# EAGLE board mini_17_cpxsq_modified (EAGLE 6.0)
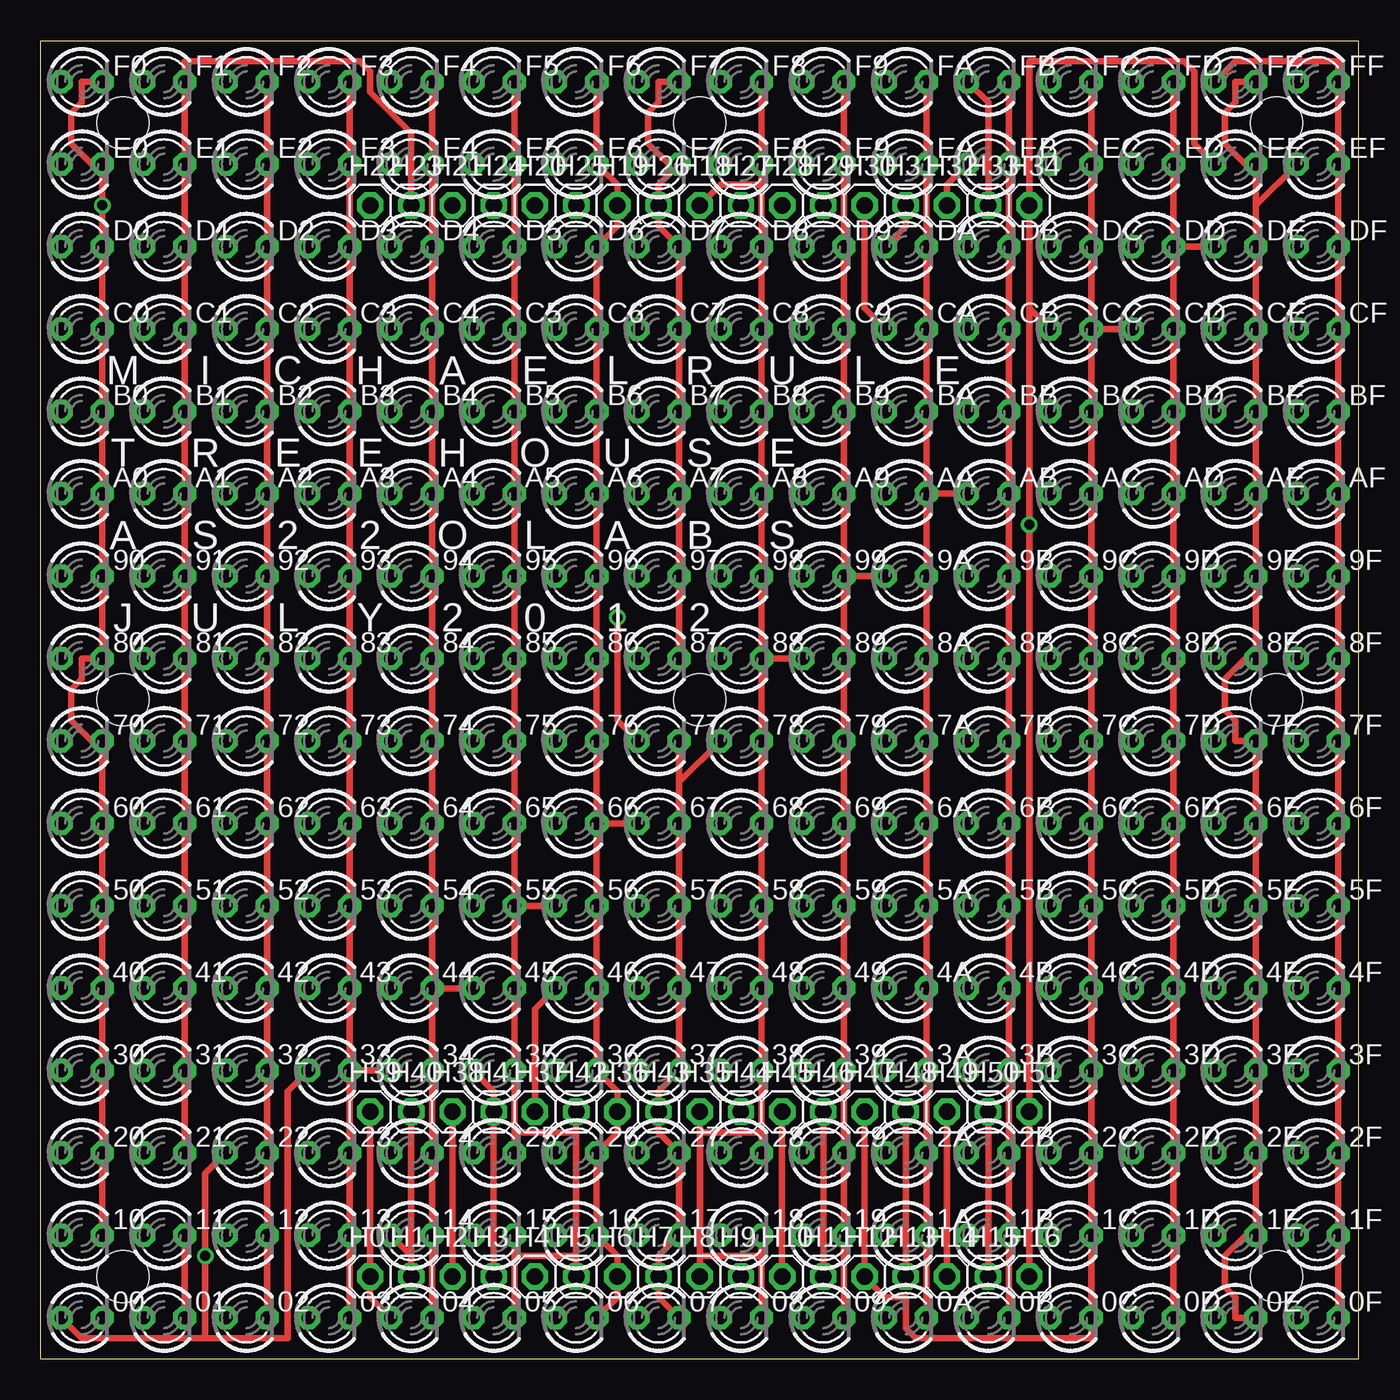
[diagram p0: board, top side]
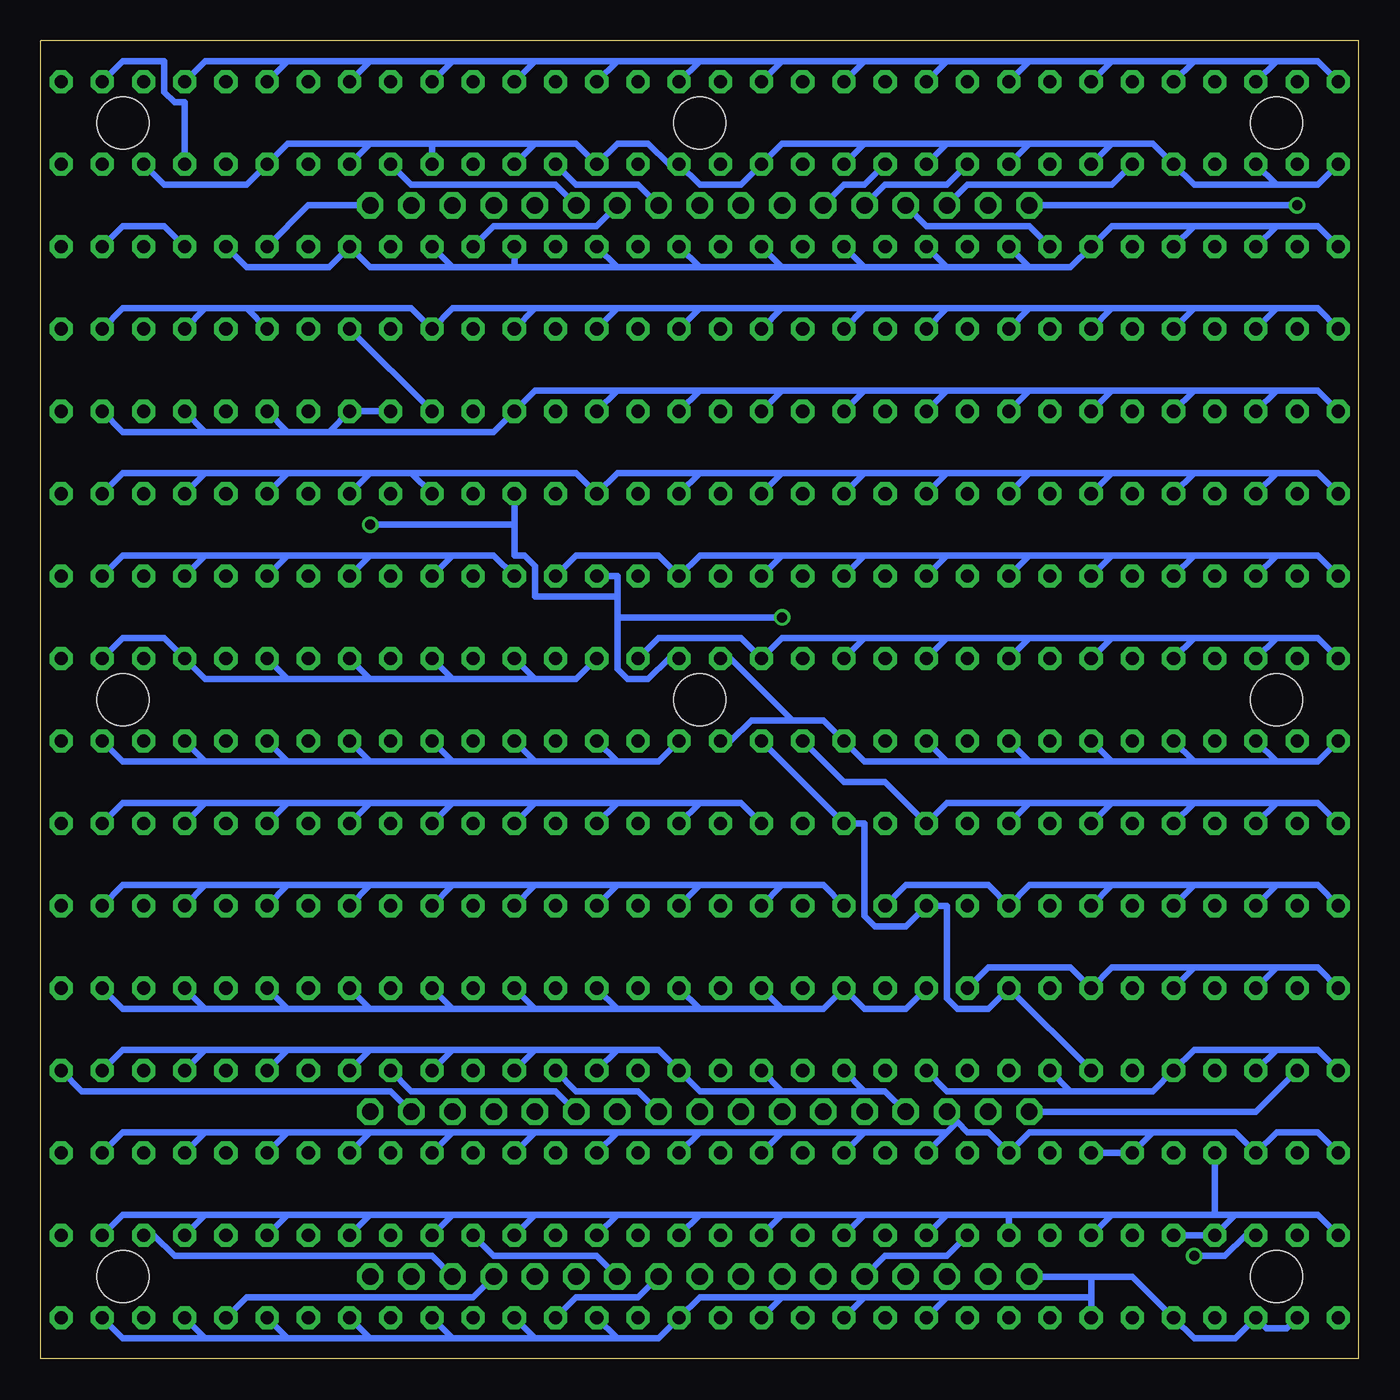
[diagram p1: board, bottom side, seen from below]

Size 81.28 x 81.28 mm. Coordinates in mm from the lower left corner, seen from the top.
Outline: 0,0 0,81.28 81.28,81.28 81.28,0 0,0
Copper layers (1*16): Top 0.035mm / dielectric 1.5mm / Bottom 0.035mm
Design rules: minimum track width 16mil, minimum drill 24mil, track to track 15mil, track to pad 8mil, pad to pad 12mil, via to via 11mil, smd to smd 8mil, copper to edge 40mil, drill to drill 8mil, minimum pad ring 12mil, minimum via ring 8mil, stop-mask expansion 4mil, vias tented up to drill 0mil, thermal gap 10mil
Holes 3.2 mm at 5.08,5.08 5.08,76.2 76.2,5.08 76.2,76.2 5.08,40.64 76.2,40.64 40.64,76.2 40.64,40.64

## Footprints (pad centres in the part's own frame; a part is rotated, then mirrored left to right if it is on the bottom)
LED3MM = drill 0.813 octagon: A -1.27,0; K 1.27,0
1X01 = drill 1.016 octagon: 1 0,0

## Placement (x,y rotation side)
00  [LED3MM]  2.54,2.54 0 top
0A  [LED3MM]  53.34,2.54 0 top
0B  [LED3MM]  58.42,2.54 0 top
0C  [LED3MM]  63.5,2.54 0 top
0D  [LED3MM]  68.58,2.54 0 top
0E  [LED3MM]  73.66,2.54 0 top
0F  [LED3MM]  78.74,2.54 0 top
01  [LED3MM]  7.62,2.54 0 top
1A  [LED3MM]  53.34,7.62 0 top
1B  [LED3MM]  58.42,7.62 0 top
1C  [LED3MM]  63.5,7.62 0 top
1D  [LED3MM]  68.58,7.62 0 top
1E  [LED3MM]  73.66,7.62 0 top
1F  [LED3MM]  78.74,7.62 0 top
02  [LED3MM]  12.7,2.54 0 top
2A  [LED3MM]  53.34,12.7 0 top
2B  [LED3MM]  58.42,12.7 0 top
2C  [LED3MM]  63.5,12.7 0 top
2D  [LED3MM]  68.58,12.7 0 top
2E  [LED3MM]  73.66,12.7 0 top
2F  [LED3MM]  78.74,12.7 0 top
03  [LED3MM]  17.78,2.54 0 top
3A  [LED3MM]  53.34,17.78 0 top
3B  [LED3MM]  58.42,17.78 0 top
3C  [LED3MM]  63.5,17.78 0 top
3D  [LED3MM]  68.58,17.78 0 top
3E  [LED3MM]  73.66,17.78 0 top
3F  [LED3MM]  78.74,17.78 0 top
04  [LED3MM]  22.86,2.54 0 top
4A  [LED3MM]  53.34,22.86 0 top
4B  [LED3MM]  58.42,22.86 0 top
4C  [LED3MM]  63.5,22.86 0 top
4D  [LED3MM]  68.58,22.86 0 top
4E  [LED3MM]  73.66,22.86 0 top
4F  [LED3MM]  78.74,22.86 0 top
05  [LED3MM]  27.94,2.54 0 top
5A  [LED3MM]  53.34,27.94 0 top
5B  [LED3MM]  58.42,27.94 0 top
5C  [LED3MM]  63.5,27.94 0 top
5D  [LED3MM]  68.58,27.94 0 top
5E  [LED3MM]  73.66,27.94 0 top
5F  [LED3MM]  78.74,27.94 0 top
06  [LED3MM]  33.02,2.54 0 top
6A  [LED3MM]  53.34,33.02 0 top
6B  [LED3MM]  58.42,33.02 0 top
6C  [LED3MM]  63.5,33.02 0 top
6D  [LED3MM]  68.58,33.02 0 top
6E  [LED3MM]  73.66,33.02 0 top
6F  [LED3MM]  78.74,33.02 0 top
07  [LED3MM]  38.1,2.54 0 top
7A  [LED3MM]  53.34,38.1 0 top
7B  [LED3MM]  58.42,38.1 0 top
7C  [LED3MM]  63.5,38.1 0 top
7D  [LED3MM]  68.58,38.1 0 top
7E  [LED3MM]  73.66,38.1 0 top
7F  [LED3MM]  78.74,38.1 0 top
08  [LED3MM]  43.18,2.54 0 top
8A  [LED3MM]  53.34,43.18 0 top
8B  [LED3MM]  58.42,43.18 0 top
8C  [LED3MM]  63.5,43.18 0 top
8D  [LED3MM]  68.58,43.18 0 top
8E  [LED3MM]  73.66,43.18 0 top
8F  [LED3MM]  78.74,43.18 0 top
09  [LED3MM]  48.26,2.54 0 top
9A  [LED3MM]  53.34,48.26 0 top
9B  [LED3MM]  58.42,48.26 0 top
9C  [LED3MM]  63.5,48.26 0 top
9D  [LED3MM]  68.58,48.26 0 top
9E  [LED3MM]  73.66,48.26 0 top
9F  [LED3MM]  78.74,48.26 0 top
10  [LED3MM]  2.54,7.62 0 top
11  [LED3MM]  7.62,7.62 0 top
12  [LED3MM]  12.7,7.62 0 top
13  [LED3MM]  17.78,7.62 0 top
14  [LED3MM]  22.86,7.62 0 top
15  [LED3MM]  27.94,7.62 0 top
16  [LED3MM]  33.02,7.62 0 top
17  [LED3MM]  38.1,7.62 0 top
18  [LED3MM]  43.18,7.62 0 top
19  [LED3MM]  48.26,7.62 0 top
20  [LED3MM]  2.54,12.7 0 top
21  [LED3MM]  7.62,12.7 0 top
22  [LED3MM]  12.7,12.7 0 top
23  [LED3MM]  17.78,12.7 0 top
24  [LED3MM]  22.86,12.7 0 top
25  [LED3MM]  27.94,12.7 0 top
26  [LED3MM]  33.02,12.7 0 top
27  [LED3MM]  38.1,12.7 0 top
28  [LED3MM]  43.18,12.7 0 top
29  [LED3MM]  48.26,12.7 0 top
30  [LED3MM]  2.54,17.78 0 top
31  [LED3MM]  7.62,17.78 0 top
32  [LED3MM]  12.7,17.78 0 top
33  [LED3MM]  17.78,17.78 0 top
34  [LED3MM]  22.86,17.78 0 top
35  [LED3MM]  27.94,17.78 0 top
36  [LED3MM]  33.02,17.78 0 top
37  [LED3MM]  38.1,17.78 0 top
38  [LED3MM]  43.18,17.78 0 top
39  [LED3MM]  48.26,17.78 0 top
40  [LED3MM]  2.54,22.86 0 top
41  [LED3MM]  7.62,22.86 0 top
42  [LED3MM]  12.7,22.86 0 top
43  [LED3MM]  17.78,22.86 0 top
44  [LED3MM]  22.86,22.86 0 top
45  [LED3MM]  27.94,22.86 0 top
46  [LED3MM]  33.02,22.86 0 top
47  [LED3MM]  38.1,22.86 0 top
48  [LED3MM]  43.18,22.86 0 top
49  [LED3MM]  48.26,22.86 0 top
50  [LED3MM]  2.54,27.94 0 top
51  [LED3MM]  7.62,27.94 0 top
52  [LED3MM]  12.7,27.94 0 top
53  [LED3MM]  17.78,27.94 0 top
54  [LED3MM]  22.86,27.94 0 top
55  [LED3MM]  27.94,27.94 0 top
56  [LED3MM]  33.02,27.94 0 top
57  [LED3MM]  38.1,27.94 0 top
58  [LED3MM]  43.18,27.94 0 top
59  [LED3MM]  48.26,27.94 0 top
60  [LED3MM]  2.54,33.02 0 top
61  [LED3MM]  7.62,33.02 0 top
62  [LED3MM]  12.7,33.02 0 top
63  [LED3MM]  17.78,33.02 0 top
64  [LED3MM]  22.86,33.02 0 top
65  [LED3MM]  27.94,33.02 0 top
66  [LED3MM]  33.02,33.02 0 top
67  [LED3MM]  38.1,33.02 0 top
68  [LED3MM]  43.18,33.02 0 top
69  [LED3MM]  48.26,33.02 0 top
70  [LED3MM]  2.54,38.1 0 top
71  [LED3MM]  7.62,38.1 0 top
72  [LED3MM]  12.7,38.1 0 top
73  [LED3MM]  17.78,38.1 0 top
74  [LED3MM]  22.86,38.1 0 top
75  [LED3MM]  27.94,38.1 0 top
76  [LED3MM]  33.02,38.1 0 top
77  [LED3MM]  38.1,38.1 0 top
78  [LED3MM]  43.18,38.1 0 top
79  [LED3MM]  48.26,38.1 0 top
80  [LED3MM]  2.54,43.18 0 top
81  [LED3MM]  7.62,43.18 0 top
82  [LED3MM]  12.7,43.18 0 top
83  [LED3MM]  17.78,43.18 0 top
84  [LED3MM]  22.86,43.18 0 top
85  [LED3MM]  27.94,43.18 0 top
86  [LED3MM]  33.02,43.18 0 top
87  [LED3MM]  38.1,43.18 0 top
88  [LED3MM]  43.18,43.18 0 top
89  [LED3MM]  48.26,43.18 0 top
90  [LED3MM]  2.54,48.26 0 top
91  [LED3MM]  7.62,48.26 0 top
92  [LED3MM]  12.7,48.26 0 top
93  [LED3MM]  17.78,48.26 0 top
94  [LED3MM]  22.86,48.26 0 top
95  [LED3MM]  27.94,48.26 0 top
96  [LED3MM]  33.02,48.26 0 top
97  [LED3MM]  38.1,48.26 0 top
98  [LED3MM]  43.18,48.26 0 top
99  [LED3MM]  48.26,48.26 0 top
A0  [LED3MM]  2.54,53.34 0 top
A1  [LED3MM]  7.62,53.34 0 top
A2  [LED3MM]  12.7,53.34 0 top
A3  [LED3MM]  17.78,53.34 0 top
A4  [LED3MM]  22.86,53.34 0 top
A5  [LED3MM]  27.94,53.34 0 top
A6  [LED3MM]  33.02,53.34 0 top
A7  [LED3MM]  38.1,53.34 0 top
A8  [LED3MM]  43.18,53.34 0 top
A9  [LED3MM]  48.26,53.34 0 top
AA  [LED3MM]  53.34,53.34 0 top
AB  [LED3MM]  58.42,53.34 0 top
AC  [LED3MM]  63.5,53.34 0 top
AD  [LED3MM]  68.58,53.34 0 top
AE  [LED3MM]  73.66,53.34 0 top
AF  [LED3MM]  78.74,53.34 0 top
B0  [LED3MM]  2.54,58.42 0 top
B1  [LED3MM]  7.62,58.42 0 top
B2  [LED3MM]  12.7,58.42 0 top
B3  [LED3MM]  17.78,58.42 0 top
B4  [LED3MM]  22.86,58.42 0 top
B5  [LED3MM]  27.94,58.42 0 top
B6  [LED3MM]  33.02,58.42 0 top
B7  [LED3MM]  38.1,58.42 0 top
B8  [LED3MM]  43.18,58.42 0 top
B9  [LED3MM]  48.26,58.42 0 top
BA  [LED3MM]  53.34,58.42 0 top
BB  [LED3MM]  58.42,58.42 0 top
BC  [LED3MM]  63.5,58.42 0 top
BD  [LED3MM]  68.58,58.42 0 top
BE  [LED3MM]  73.66,58.42 0 top
BF  [LED3MM]  78.74,58.42 0 top
C0  [LED3MM]  2.54,63.5 0 top
C1  [LED3MM]  7.62,63.5 0 top
C2  [LED3MM]  12.7,63.5 0 top
C3  [LED3MM]  17.78,63.5 0 top
C4  [LED3MM]  22.86,63.5 0 top
C5  [LED3MM]  27.94,63.5 0 top
C6  [LED3MM]  33.02,63.5 0 top
C7  [LED3MM]  38.1,63.5 0 top
C8  [LED3MM]  43.18,63.5 0 top
C9  [LED3MM]  48.26,63.5 0 top
CA  [LED3MM]  53.34,63.5 0 top
CB  [LED3MM]  58.42,63.5 0 top
CC  [LED3MM]  63.5,63.5 0 top
CD  [LED3MM]  68.58,63.5 0 top
CE  [LED3MM]  73.66,63.5 0 top
CF  [LED3MM]  78.74,63.5 0 top
D0  [LED3MM]  2.54,68.58 0 top
D1  [LED3MM]  7.62,68.58 0 top
D2  [LED3MM]  12.7,68.58 0 top
D3  [LED3MM]  17.78,68.58 0 top
D4  [LED3MM]  22.86,68.58 0 top
D5  [LED3MM]  27.94,68.58 0 top
D6  [LED3MM]  33.02,68.58 0 top
D7  [LED3MM]  38.1,68.58 0 top
D8  [LED3MM]  43.18,68.58 0 top
D9  [LED3MM]  48.26,68.58 0 top
DA  [LED3MM]  53.34,68.58 0 top
DB  [LED3MM]  58.42,68.58 0 top
DC  [LED3MM]  63.5,68.58 0 top
DD  [LED3MM]  68.58,68.58 0 top
DE  [LED3MM]  73.66,68.58 0 top
DF  [LED3MM]  78.74,68.58 0 top
E0  [LED3MM]  2.54,73.66 0 top
E1  [LED3MM]  7.62,73.66 0 top
E2  [LED3MM]  12.7,73.66 0 top
E3  [LED3MM]  17.78,73.66 0 top
E4  [LED3MM]  22.86,73.66 0 top
E5  [LED3MM]  27.94,73.66 0 top
E6  [LED3MM]  33.02,73.66 0 top
E7  [LED3MM]  38.1,73.66 0 top
E8  [LED3MM]  43.18,73.66 0 top
E9  [LED3MM]  48.26,73.66 0 top
EA  [LED3MM]  53.34,73.66 0 top
EB  [LED3MM]  58.42,73.66 0 top
EC  [LED3MM]  63.5,73.66 0 top
ED  [LED3MM]  68.58,73.66 0 top
EE  [LED3MM]  73.66,73.66 0 top
EF  [LED3MM]  78.74,73.66 0 top
F0  [LED3MM]  2.54,78.74 0 top
F1  [LED3MM]  7.62,78.74 0 top
F2  [LED3MM]  12.7,78.74 0 top
F3  [LED3MM]  17.78,78.74 0 top
F4  [LED3MM]  22.86,78.74 0 top
F5  [LED3MM]  27.94,78.74 0 top
F6  [LED3MM]  33.02,78.74 0 top
F7  [LED3MM]  38.1,78.74 0 top
F8  [LED3MM]  43.18,78.74 0 top
F9  [LED3MM]  48.26,78.74 0 top
FA  [LED3MM]  53.34,78.74 0 top
FB  [LED3MM]  58.42,78.74 0 top
FC  [LED3MM]  63.5,78.74 0 top
FD  [LED3MM]  68.58,78.74 0 top
FE  [LED3MM]  73.66,78.74 0 top
FF  [LED3MM]  78.74,78.74 0 top
H0  [1X01]  20.32,5.08 0 top
H1  [1X01]  22.86,5.08 0 top
H2  [1X01]  25.4,5.08 0 top
H3  [1X01]  27.94,5.08 0 top
H4  [1X01]  30.48,5.08 0 top
H5  [1X01]  33.02,5.08 0 top
H6  [1X01]  35.56,5.08 0 top
H7  [1X01]  38.1,5.08 0 top
H8  [1X01]  40.64,5.08 0 top
H9  [1X01]  43.18,5.08 0 top
H10  [1X01]  45.72,5.08 0 top
H11  [1X01]  48.26,5.08 0 top
H12  [1X01]  50.8,5.08 0 top
H13  [1X01]  53.34,5.08 0 top
H14  [1X01]  55.88,5.08 0 top
H15  [1X01]  58.42,5.08 0 top
H16  [1X01]  60.96,5.08 0 top
H18  [1X01]  40.64,71.12 0 top
H19  [1X01]  35.56,71.12 0 top
H20  [1X01]  30.48,71.12 0 top
H21  [1X01]  25.4,71.12 0 top
H22  [1X01]  20.32,71.12 0 top
H23  [1X01]  22.86,71.12 0 top
H24  [1X01]  27.94,71.12 0 top
H25  [1X01]  33.02,71.12 0 top
H26  [1X01]  38.1,71.12 0 top
H27  [1X01]  43.18,71.12 0 top
H28  [1X01]  45.72,71.12 0 top
H29  [1X01]  48.26,71.12 0 top
H30  [1X01]  50.8,71.12 0 top
H31  [1X01]  53.34,71.12 0 top
H32  [1X01]  55.88,71.12 0 top
H33  [1X01]  58.42,71.12 0 top
H34  [1X01]  60.96,71.12 0 top
H35  [1X01]  40.64,15.24 0 top
H36  [1X01]  35.56,15.24 0 top
H37  [1X01]  30.48,15.24 0 top
H38  [1X01]  25.4,15.24 0 top
H39  [1X01]  20.32,15.24 0 top
H40  [1X01]  22.86,15.24 0 top
H41  [1X01]  27.94,15.24 0 top
H42  [1X01]  33.02,15.24 0 top
H43  [1X01]  38.1,15.24 0 top
H44  [1X01]  43.18,15.24 0 top
H45  [1X01]  45.72,15.24 0 top
H46  [1X01]  48.26,15.24 0 top
H47  [1X01]  50.8,15.24 0 top
H48  [1X01]  53.34,15.24 0 top
H49  [1X01]  55.88,15.24 0 top
H50  [1X01]  58.42,15.24 0 top
H51  [1X01]  60.96,15.24 0 top

## Library data of the parts
00 0A 0B 0C 0D 0E 0F 01 1A 1B 1C 1D 1E 1F 02 2A 2B 2C 2D 2E 2F 03 3A 3B 3C 3D 3E 3F 04 4A 4B 4C 4D 4E 4F 05 5A 5B 5C 5D 5E 5F 06 6A 6B 6C 6D 6E 6F 07 7A 7B 7C 7D 7E 7F 08 8A 8B 8C 8D 8E 8F 09 9A 9B 9C 9D 9E 9F 10-99 A0 A1-A9 AA AB AC AD AE AF B0 B1-B9 BA BB BC BD BE BF C0 C1-C9 CA CB CC CD CE CF D0 D1-D9 DA DB DC DD DE DF E0 E1-E9 EA EB EC ED EE EF F0 F1-F9 FA FB FC FD FE FF = led
H0 H1-H16 H18-H51 = pinhead

## Nets
D: 00.A 11.A 22.A 33.A 44.A 55.A 66.A 77.A 88.A 99.A AA.A BB.A CC.A DD.A EE.A FF.A H16.1 H34.1 H51.1
S0: 00.K 0A.A 0B.A 0C.A 0D.A 0E.A 0F.A 01.A 02.A 03.A 04.A 05.A 06.A 07.A 08.A 09.A 10.K 20.K 30.K 40.K 50.K 60.K 70.K 80.K 90.K A0.K B0.K C0.K D0.K E0.K F0.K H0.1 H22.1 H39.1
S1: 01.K 1A.A 1B.A 1C.A 1D.A 1E.A 1F.A 10.A 11.K 12.A 13.A 14.A 15.A 16.A 17.A 18.A 19.A 21.K 31.K 41.K 51.K 61.K 71.K 81.K 91.K A1.K B1.K C1.K D1.K E1.K F1.K H1.1 H23.1 H40.1
S2: 02.K 2A.A 2B.A 2C.A 2D.A 2E.A 2F.A 12.K 20.A 21.A 22.K 23.A 24.A 25.A 26.A 27.A 28.A 29.A 32.K 42.K 52.K 62.K 72.K 82.K 92.K A2.K B2.K C2.K D2.K E2.K F2.K H2.1 H21.1 H38.1
S3: 03.K 3A.A 3B.A 3C.A 3D.A 3E.A 3F.A 13.K 23.K 30.A 31.A 32.A 33.K 34.A 35.A 36.A 37.A 38.A 39.A 43.K 53.K 63.K 73.K 83.K 93.K A3.K B3.K C3.K D3.K E3.K F3.K H3.1 H24.1 H41.1
S4: 04.K 4A.A 4B.A 4C.A 4D.A 4E.A 4F.A 14.K 24.K 34.K 40.A 41.A 42.A 43.A 44.K 45.A 46.A 47.A 48.A 49.A 54.K 64.K 74.K 84.K 94.K A4.K B4.K C4.K D4.K E4.K F4.K H4.1 H20.1 H37.1
S5: 05.K 5A.A 5B.A 5C.A 5D.A 5E.A 5F.A 15.K 25.K 35.K 45.K 50.A 51.A 52.A 53.A 54.A 55.K 56.A 57.A 58.A 59.A 65.K 75.K 85.K 95.K A5.K B5.K C5.K D5.K E5.K F5.K H5.1 H25.1 H42.1
S6: 06.K 6A.A 6B.A 6C.A 6D.A 6E.A 6F.A 16.K 26.K 36.K 46.K 56.K 60.A 61.A 62.A 63.A 64.A 65.A 66.K 67.A 68.A 69.A 76.K 86.K 96.K A6.K B6.K C6.K D6.K E6.K F6.K H6.1 H19.1 H36.1
S7: 07.K 7A.A 7B.A 7C.A 7D.A 7E.A 7F.A 17.K 27.K 37.K 47.K 57.K 67.K 70.A 71.A 72.A 73.A 74.A 75.A 76.A 77.K 78.A 79.A 87.K 97.K A7.K B7.K C7.K D7.K E7.K F7.K H7.1 H26.1 H43.1
S8: 08.K 8A.A 8B.A 8C.A 8D.A 8E.A 8F.A 18.K 28.K 38.K 48.K 58.K 68.K 78.K 80.A 81.A 82.A 83.A 84.A 85.A 86.A 87.A 88.K 89.A 98.K A8.K B8.K C8.K D8.K E8.K F8.K H8.1 H18.1 H35.1
S9: 09.K 9A.A 9B.A 9C.A 9D.A 9E.A 9F.A 19.K 29.K 39.K 49.K 59.K 69.K 79.K 89.K 90.A 91.A 92.A 93.A 94.A 95.A 96.A 97.A 98.A 99.K A9.K B9.K C9.K D9.K E9.K F9.K H9.1 H27.1 H44.1
S10: 0A.K 1A.K 2A.K 3A.K 4A.K 5A.K 6A.K 7A.K 8A.K 9A.K A0.A A1.A A2.A A3.A A4.A A5.A A6.A A7.A A8.A A9.A AA.K AB.A AC.A AD.A AE.A AF.A BA.K CA.K DA.K EA.K FA.K H10.1 H28.1 H45.1
S11: 0B.K 1B.K 2B.K 3B.K 4B.K 5B.K 6B.K 7B.K 8B.K 9B.K AB.K B0.A B1.A B2.A B3.A B4.A B5.A B6.A B7.A B8.A B9.A BA.A BB.K BC.A BD.A BE.A BF.A CB.K DB.K EB.K FB.K H11.1 H29.1 H46.1
S12: 0C.K 1C.K 2C.K 3C.K 4C.K 5C.K 6C.K 7C.K 8C.K 9C.K AC.K BC.K C0.A C1.A C2.A C3.A C4.A C5.A C6.A C7.A C8.A C9.A CA.A CB.A CC.K CD.A CE.A CF.A DC.K EC.K FC.K H12.1 H30.1 H47.1
S13: 0D.K 1D.K 2D.K 3D.K 4D.K 5D.K 6D.K 7D.K 8D.K 9D.K AD.K BD.K CD.K D0.A D1.A D2.A D3.A D4.A D5.A D6.A D7.A D8.A D9.A DA.A DB.A DC.A DD.K DE.A DF.A ED.K FD.K H13.1 H31.1 H48.1
S14: 0E.K 1E.K 2E.K 3E.K 4E.K 5E.K 6E.K 7E.K 8E.K 9E.K AE.K BE.K CE.K DE.K E0.A E1.A E2.A E3.A E4.A E5.A E6.A E7.A E8.A E9.A EA.A EB.A EC.A ED.A EE.K EF.A FE.K H14.1 H32.1 H49.1
S15: 0F.K 1F.K 2F.K 3F.K 4F.K 5F.K 6F.K 7F.K 8F.K 9F.K AF.K BF.K CF.K DF.K EF.K F0.A F1.A F2.A F3.A F4.A F5.A F6.A F7.A F8.A F9.A FA.A FB.A FC.A FD.A FE.A FF.K H15.1 H33.1 H50.1

## Tracks (layer width: path | path; a pad name or v marks a point on that pad's centre or on a via)
D  (via drill 0.61)
  Top 0.406: 00.A 2.54,1.27 10.16,1.27 | 10.16,1.27 v10.16,6.35 10.16,11.43 22.A | 10.16,1.27 15.24,1.27 15.24,16.51 33.A | H16.1 H51.1 v60.96,51.44 60.96,64.77 | 60.96,64.77 H34.1 60.96,80.01 70.48,80.01 71.12,79.38 71.12,74.93 EE.A | CC.A 60.96,64.77 | 77.A 35.56,39.37 v35.56,45.72
  Bottom 0.406: 11.A 6.99,7.62 8.26,6.35 v10.16,6.35 | 33.A 44.A 22.86,21.59 24.77,21.59 25.4,22.23 25.4,27.94 55.A 27.94,26.67 29.84,26.67 30.48,27.3 30.48,33.02 66.A 77.A | 88.A 42.55,43.18 43.81,41.91 45.09,41.91 45.72,42.55 45.72,45.72 | 45.72,46.99 45.72,48.26 99.A | 45.72,46.99 45.72,45.72 | 52.07,51.44 52.07,49.53 51.44,49.53 50.8,48.9 50.8,46.99 45.72,46.99 | 52.07,51.44 AA.A | EE.A 72.39,77.47 73.03,77.47 73.66,78.11 73.66,80.01 76.2,80.01 FF.A | DD.A 64.77,71.12 H34.1 | CC.A BB.A | v60.96,51.44 52.07,51.44 | 45.72,45.72 v35.56,45.72
S0  (via drill 0.61)
  Top 0.406: 3.81,73.03 v3.81,71.12 D0.K C0.K B0.K A0.K 90.K 80.K 2.54,43.18 2.54,41.91 1.91,41.27 1.91,39.37 3.81,37.47 | F0.K 2.54,78.74 2.54,77.47 1.91,76.83 1.91,74.93 3.81,73.03 | 3.81,73.03 E0.K | 3.81,37.47 60.K 50.K 40.K 30.K 20.K 10.K | 04.A 20.32,3.81 H0.1 H39.1 | 3.81,37.47 70.K
  Bottom 0.406: v3.81,71.12 H22.1 | 00.K 4.45,1.91 5.71,1.91 01.A 7.62,1.27 10.16,1.27 02.A 13.97,5.08 16.51,5.08 | H0.1 16.51,5.08 | 16.51,5.08 16.51,3.81 | 16.51,3.81 03.A | 25.4,3.81 05.A | 16.51,3.81 25.4,3.81 | 30.48,3.81 06.A | 25.4,3.81 30.48,3.81 | 35.56,3.81 07.A | 30.48,3.81 35.56,3.81 | 35.56,3.81 40.64,3.81 08.A 43.18,1.27 45.72,1.27 | 45.72,1.27 09.A | 50.8,1.27 0A.A | 45.72,1.27 50.8,1.27 | 55.88,1.27 0B.A | 50.8,1.27 55.88,1.27 | 60.96,1.27 0C.A | 55.88,1.27 60.96,1.27 | 66.04,1.27 0D.A | 60.96,1.27 66.04,1.27 | 71.12,1.27 0E.A | 66.04,1.27 71.12,1.27 | 0F.A 76.2,1.27 71.12,1.27 | 30.K 6.35,15.24 H39.1
S1
  Top 0.406: H23.1 22.86,75.56 20.32,78.11 20.32,79.38 19.68,80.01 8.89,80.01 F1.K E1.K D1.K C1.K B1.K A1.K 91.K 81.K 71.K 61.K 51.K 41.K 31.K 21.K | 22.86,6.35 14.A | H1.1 22.86,6.35 | 22.86,6.35 H40.1 | 11.K 01.K
  Bottom 0.406: 10.A 2.54,8.89 7.62,8.89 | 7.62,8.89 11.K 12.A | 15.24,8.89 13.A | 7.62,8.89 8.89,8.89 | 8.89,8.89 15.24,8.89 | 8.89,8.89 21.K | 25.4,8.89 15.A | 15.24,8.89 21.59,8.89 | 21.59,8.89 25.4,8.89 | 30.48,8.89 16.A | 25.4,8.89 30.48,8.89 | 35.56,8.89 17.A | 30.48,8.89 35.56,8.89 | 40.64,8.89 18.A | 35.56,8.89 40.64,8.89 | 45.72,8.89 19.A | 40.64,8.89 45.72,8.89 | 50.8,8.89 1A.A | 45.72,8.89 50.8,8.89 | 55.88,8.89 1B.A | 50.8,8.89 55.88,8.89 | 60.96,8.89 1C.A | 55.88,8.89 60.96,8.89 | 66.04,8.89 1D.A | 60.96,8.89 66.04,8.89 | 71.12,8.89 1E.A | 66.04,8.89 71.12,8.89 | 1F.A 76.2,8.89 71.12,8.89 | 21.59,8.89 14.A
S2
  Top 0.406: H38.1 H2.1 | F2.K E2.K D2.K C2.K B2.K A2.K 92.K 82.K 72.K 62.K 52.K 42.K 32.K 22.K 12.K 02.K
  Bottom 0.406: H38.1 24.77,14.61 | 24.77,14.61 24.13,13.97 22.86,13.97 24.A 20.32,13.97 12.7,13.97 | 24.77,14.61 25.4,13.97 | 25.4,13.97 25.A | 30.48,13.97 26.A | 25.4,13.97 30.48,13.97 | 35.56,13.97 27.A | 30.48,13.97 35.56,13.97 | 40.64,13.97 28.A | 35.56,13.97 40.64,13.97 | 45.72,13.97 29.A | 40.64,13.97 45.72,13.97 | 50.8,13.97 2A.A | 45.72,13.97 50.8,13.97 | 55.88,13.97 2B.A | 50.8,13.97 55.88,13.97 | 60.96,13.97 2C.A | 55.88,13.97 60.96,13.97 | 66.04,13.97 2D.A | 60.96,13.97 66.04,13.97 | 71.12,13.97 2E.A | 66.04,13.97 71.12,13.97 | 2F.A 76.2,13.97 71.12,13.97 | H21.1 24.13,72.39 15.24,72.39 E2.K | 20.A 2.54,13.97 5.08,13.97 21.A 7.62,13.97 12.7,13.97 | 23.A 22.K 12.7,13.97
S3
  Top 0.406: 35.A 27.94,16.51 H41.1 H3.1 | F3.K E3.K D3.K C3.K B3.K A3.K 93.K 83.K 73.K 63.K 53.K 43.K 33.K | 03.K 13.K 23.K 33.K | 33.K 34.A
  Bottom 0.406: 30.48,16.51 36.A | 30.48,16.51 29.21,16.51 H41.1 | 35.56,16.51 37.A | 30.48,16.51 35.56,16.51 | 35.56,16.51 40.64,16.51 38.A 43.18,19.05 45.72,19.05 | 45.72,19.05 39.A | 50.8,19.05 3A.A | 45.72,19.05 50.8,19.05 | 55.88,19.05 3B.A | 50.8,19.05 55.88,19.05 | 60.96,19.05 3C.A | 55.88,19.05 60.96,19.05 | 66.04,19.05 3D.A | 60.96,19.05 66.04,19.05 | 71.12,19.05 3E.A | 66.04,19.05 71.12,19.05 | 3F.A 76.2,19.05 71.12,19.05 | H24.1 26.67,69.85 20.32,69.85 D3.K | 30.A 2.54,19.05 5.08,19.05 | 31.A 5.08,19.05 | 5.08,19.05 10.16,19.05 32.A 12.7,16.51 17.78,16.51 | 33.K 17.78,16.51 | 35.A 25.4,16.51 17.78,16.51
S4
  Top 0.406: 46.A 30.48,21.59 H37.1 | 04.K 14.K 24.K 34.K 44.K | F4.K E4.K D4.K C4.K B4.K A4.K 94.K 84.K 74.K 64.K 54.K 44.K | 45.A 44.K
  Bottom 0.406: 35.56,21.59 47.A | 35.56,21.59 33.02,21.59 46.A 30.48,21.59 27.94,21.59 45.A | 40.64,21.59 48.A | 35.56,21.59 40.64,21.59 | 45.72,21.59 49.A | 40.64,21.59 45.72,21.59 | 50.8,21.59 4A.A | 45.72,21.59 50.8,21.59 | 55.88,21.59 4B.A | 50.8,21.59 55.88,21.59 | 60.96,21.59 4C.A | 55.88,21.59 60.96,21.59 | 66.04,21.59 4D.A | 60.96,21.59 66.04,21.59 | 71.12,21.59 4E.A | 66.04,21.59 71.12,21.59 | 4F.A 76.2,21.59 71.12,21.59 | H4.1 29.21,6.35 25.4,6.35 14.K | H20.1 29.21,72.39 25.4,72.39 E4.K | 40.A 2.54,24.13 5.08,24.13 | 41.A 5.08,24.13 | 10.16,24.13 42.A | 5.08,24.13 10.16,24.13 | 10.16,24.13 15.24,24.13 43.A 17.78,24.13 22.86,24.13 44.K
S5
  Top 0.406: 29.21,13.97 35.K 45.K 55.K | 29.21,13.97 25.K | 15.K 29.21,6.35 | 29.21,6.35 05.K | H42.1 33.02,13.97 | 33.02,13.97 33.02,6.35 | 33.02,6.35 H5.1 | 33.02,6.35 29.21,6.35 | 33.02,13.97 29.21,13.97 | F5.K E5.K D5.K C5.K B5.K A5.K 95.K 85.K 75.K 65.K 55.K | 55.K 56.A
  Bottom 0.406: 50.A 2.54,29.21 5.08,29.21 | 51.A 5.08,29.21 | 10.16,29.21 52.A | 5.08,29.21 10.16,29.21 | 15.24,29.21 53.A | 10.16,29.21 15.24,29.21 | 15.24,29.21 20.32,29.21 54.A 22.86,29.21 27.94,29.21 55.K | H25.1 31.75,72.39 30.48,72.39 E5.K | 35.56,29.21 57.A | 35.56,29.21 33.02,29.21 56.A | 40.64,29.21 58.A | 35.56,29.21 40.64,29.21 | 45.72,29.21 59.A | 40.64,29.21 45.72,29.21 | 50.8,29.21 5A.A | 45.72,29.21 50.8,29.21 | 55.88,29.21 5B.A | 50.8,29.21 55.88,29.21 | 60.96,29.21 5C.A | 55.88,29.21 60.96,29.21 | 66.04,29.21 5D.A | 60.96,29.21 66.04,29.21 | 71.12,29.21 5E.A | 66.04,29.21 71.12,29.21 | 5F.A 76.2,29.21 71.12,29.21
S6
  Top 0.406: 06.K 35.56,3.81 H6.1 35.56,6.35 16.K 26.K 35.56,13.97 H36.1 35.56,16.51 36.K 46.K 56.K 66.K | F6.K E6.K 35.56,72.39 H19.1 35.56,69.85 D6.K C6.K B6.K A6.K 96.K 86.K 76.K 66.K | 67.A 66.K
  Bottom 0.406: 60.A 2.54,34.29 5.08,34.29 | 61.A 5.08,34.29 | 10.16,34.29 62.A | 5.08,34.29 10.16,34.29 | 15.24,34.29 63.A | 10.16,34.29 15.24,34.29 | 20.32,34.29 64.A | 15.24,34.29 20.32,34.29 | 20.32,34.29 25.4,34.29 65.A 29.21,35.56 31.75,35.56 76.K | 40.64,34.29 68.A | 40.64,34.29 38.1,34.29 67.A | 45.72,34.29 69.A | 40.64,34.29 45.72,34.29 | 50.8,34.29 6A.A | 45.72,34.29 50.8,34.29 | 55.88,34.29 6B.A | 50.8,34.29 55.88,34.29 | 60.96,34.29 6C.A | 55.88,34.29 60.96,34.29 | 66.04,34.29 6D.A | 60.96,34.29 66.04,34.29 | 71.12,34.29 6E.A | 66.04,34.29 71.12,34.29 | 6F.A 76.2,34.29 71.12,34.29
S7
  Top 0.406: 87.K 97.K A7.K B7.K C7.K D7.K 38.1,69.85 H26.1 38.1,72.39 38.73,73.03 | 38.73,73.03 E7.K | F7.K 38.1,78.74 38.1,77.47 37.47,76.83 37.47,74.93 38.73,73.66 38.73,73.03 | 07.K 38.1,3.81 H7.1 38.1,6.35 17.K 27.K 38.1,13.97 H43.1 38.1,16.51 37.K 47.K 57.K 67.K 39.37,35.56 | 77.K 39.37,35.56 | 39.37,35.56 78.A
  Bottom 0.406: 70.A 2.54,36.83 5.08,36.83 | 71.A 5.08,36.83 | 10.16,36.83 72.A | 5.08,36.83 10.16,36.83 | 15.24,36.83 73.A | 10.16,36.83 15.24,36.83 | 20.32,36.83 74.A | 15.24,36.83 20.32,36.83 | 25.4,36.83 75.A | 20.32,36.83 25.4,36.83 | 25.4,36.83 30.48,36.83 76.A 33.02,39.37 34.92,39.37 | 45.72,36.83 79.A | 45.72,36.83 43.18,36.83 78.A | 50.8,36.83 7A.A | 45.72,36.83 50.8,36.83 | 55.88,36.83 7B.A | 50.8,36.83 55.88,36.83 | 60.96,36.83 7C.A | 55.88,36.83 60.96,36.83 | 66.04,36.83 7D.A | 60.96,36.83 66.04,36.83 | 71.12,36.83 7E.A | 66.04,36.83 71.12,36.83 | 7F.A 76.2,36.83 71.12,36.83 | 34.92,39.37 37.47,39.37 38.73,38.1 77.K | 87.K 38.73,43.18 34.92,39.37
S8
  Top 0.406: 44.45,13.97 38.K 48.K 58.K 68.K 78.K 88.K | 44.45,13.97 28.K | 18.K 44.45,6.35 | 44.45,6.35 08.K | H35.1 40.64,13.97 | 40.64,13.97 40.64,6.35 | 40.64,6.35 H8.1 | 40.64,6.35 44.45,6.35 | 40.64,13.97 44.45,13.97 | 44.45,72.39 E8.K F8.K | 44.45,72.39 D8.K C8.K B8.K A8.K 98.K 88.K | H18.1 41.91,72.39 44.45,72.39 | 89.A 88.K
  Bottom 0.406: 80.A 2.54,44.45 5.08,44.45 | 81.A 5.08,44.45 | 10.16,44.45 82.A | 5.08,44.45 10.16,44.45 | 15.24,44.45 83.A | 10.16,44.45 15.24,44.45 | 20.32,44.45 84.A | 15.24,44.45 20.32,44.45 | 25.4,44.45 85.A | 20.32,44.45 25.4,44.45 | 30.48,44.45 86.A | 25.4,44.45 30.48,44.45 | 30.48,44.45 35.56,44.45 87.A 38.1,44.45 43.18,44.45 88.K | 50.8,41.91 8A.A | 50.8,41.91 48.26,41.91 89.A | 55.88,41.91 8B.A | 50.8,41.91 55.88,41.91 | 60.96,41.91 8C.A | 55.88,41.91 60.96,41.91 | 66.04,41.91 8D.A | 60.96,41.91 66.04,41.91 | 66.04,41.91 71.12,41.91 8E.A 73.66,44.45 76.2,44.45 8F.A
S9
  Top 0.406: 09.K 19.K 29.K 39.K 49.K 59.K 69.K 79.K 89.K 99.K | F9.K E9.K D9.K C9.K B9.K A9.K 99.K | 99.K 9A.A
  Bottom 0.406: H9.1 44.45,3.81 48.26,3.81 09.K | H44.1 44.45,16.51 48.26,16.51 39.K | 90.A 2.54,49.53 5.08,49.53 | 91.A 5.08,49.53 | 10.16,49.53 92.A | 5.08,49.53 10.16,49.53 | 15.24,49.53 93.A | 10.16,49.53 15.24,49.53 | 20.32,49.53 94.A | 15.24,49.53 20.32,49.53 | 25.4,49.53 95.A | 20.32,49.53 25.4,49.53 | 30.48,49.53 96.A | 25.4,49.53 30.48,49.53 | 35.56,49.53 97.A | 30.48,49.53 35.56,49.53 | 35.56,49.53 40.64,49.53 98.A 43.18,49.53 48.26,49.53 99.K | H27.1 44.45,72.39 48.26,72.39 E9.K | 55.88,49.53 9B.A | 55.88,49.53 53.34,49.53 9A.A | 60.96,49.53 9C.A | 55.88,49.53 60.96,49.53 | 66.04,49.53 9D.A | 60.96,49.53 66.04,49.53 | 71.12,49.53 9E.A | 66.04,49.53 71.12,49.53 | 9F.A 76.2,49.53 71.12,49.53
S10
  Top 0.406: H45.1 H10.1 | 0A.K 1A.K 2A.K 3A.K 4A.K 5A.K 6A.K 7A.K 8A.K 9A.K AA.K | FA.K EA.K DA.K CA.K BA.K AA.K | AB.A AA.K
  Bottom 0.406: H10.1 46.99,6.35 53.34,6.35 1A.K | A0.A 2.54,54.61 5.08,54.61 | A1.A 5.08,54.61 | 10.16,54.61 A2.A | 5.08,54.61 10.16,54.61 | 15.24,54.61 A3.A | 10.16,54.61 15.24,54.61 | 20.32,54.61 A4.A | 15.24,54.61 20.32,54.61 | 25.4,54.61 A5.A | 20.32,54.61 25.4,54.61 | 30.48,54.61 A6.A | 25.4,54.61 30.48,54.61 | 35.56,54.61 A7.A | 30.48,54.61 35.56,54.61 | 40.64,54.61 A8.A | 35.56,54.61 40.64,54.61 | 40.64,54.61 45.72,54.61 A9.A 48.26,54.61 58.42,54.61 | H28.1 46.99,69.85 53.34,69.85 DA.K | 60.96,54.61 AC.A | 58.42,54.61 60.96,54.61 | AB.A 58.42,54.61 | 66.04,54.61 AD.A | 60.96,54.61 66.04,54.61 | 71.12,54.61 AE.A | 66.04,54.61 71.12,54.61 | AF.A 76.2,54.61 71.12,54.61
S11
  Top 0.406: H46.1 H11.1 | 0B.K 1B.K 2B.K 3B.K 4B.K 5B.K 6B.K 7B.K 8B.K 9B.K AB.K BB.K CB.K DB.K EB.K FB.K
  Bottom 0.406: H46.1 49.53,16.51 58.42,16.51 3B.K | B0.A 2.54,59.69 5.08,59.69 | B1.A 5.08,59.69 | 10.16,59.69 B2.A | 5.08,59.69 10.16,59.69 | 15.24,59.69 B3.A | 10.16,59.69 15.24,59.69 | 20.32,59.69 B4.A | 15.24,59.69 20.32,59.69 | 25.4,59.69 B5.A | 20.32,59.69 25.4,59.69 | 30.48,59.69 B6.A | 25.4,59.69 30.48,59.69 | 35.56,59.69 B7.A | 30.48,59.69 35.56,59.69 | 40.64,59.69 B8.A | 35.56,59.69 40.64,59.69 | 45.72,59.69 B9.A | 40.64,59.69 45.72,59.69 | 45.72,59.69 50.8,59.69 BA.A 53.34,57.15 63.5,57.15 | H29.1 49.53,72.39 58.42,72.39 EB.K | BB.K BC.A 63.5,57.15 | 66.04,57.15 BD.A | 63.5,57.15 66.04,57.15 | 71.12,57.15 BE.A | 66.04,57.15 71.12,57.15 | BF.A 76.2,57.15 71.12,57.15
S12
  Top 0.406: H30.1 50.8,64.77 CA.A | FC.K EC.K DC.K CC.K | CD.A CC.K | H47.1 H12.1 52.07,3.81 53.34,3.81 53.34,1.91 53.98,1.27 64.77,1.27 0C.K 1C.K 2C.K 3C.K 4C.K 5C.K 6C.K 7C.K 8C.K 9C.K AC.K BC.K CC.K
  Bottom 0.406: C0.A 2.54,64.77 5.08,64.77 | C1.A 5.08,64.77 | 10.16,64.77 C2.A | 5.08,64.77 10.16,64.77 | 15.24,64.77 C3.A | 10.16,64.77 15.24,64.77 | 20.32,64.77 C4.A | 15.24,64.77 20.32,64.77 | 25.4,64.77 C5.A | 20.32,64.77 25.4,64.77 | 30.48,64.77 C6.A | 25.4,64.77 30.48,64.77 | 35.56,64.77 C7.A | 30.48,64.77 35.56,64.77 | 40.64,64.77 C8.A | 35.56,64.77 40.64,64.77 | 45.72,64.77 C9.A | 40.64,64.77 45.72,64.77 | 50.8,64.77 CA.A | 45.72,64.77 50.8,64.77 | 50.8,64.77 55.88,64.77 CB.A 58.42,64.77 68.58,64.77 | 71.12,64.77 CE.A | 68.58,64.77 71.12,64.77 | CD.A 68.58,64.77 | CF.A 76.2,64.77 71.12,64.77
S13
  Top 0.406: DA.A 53.34,69.85 H31.1 | FD.K ED.K DD.K | DD.K CD.K BD.K AD.K 9D.K 8D.K 7D.K 6D.K 5D.K 4D.K 3D.K 2D.K 1D.K 0D.K | DD.K DE.A | H48.1 H13.1
  Bottom 0.406: D0.A 2.54,69.85 5.08,69.85 | D1.A 5.08,69.85 | 10.16,69.85 D2.A | 5.08,69.85 10.16,69.85 | 10.16,69.85 15.24,69.85 D3.A 17.78,67.31 20.32,67.31 | 20.32,67.31 D4.A | 25.4,67.31 D5.A | 20.32,67.31 25.4,67.31 | 30.48,67.31 D6.A | 25.4,67.31 30.48,67.31 | 35.56,67.31 D7.A | 30.48,67.31 35.56,67.31 | 40.64,67.31 D8.A | 35.56,67.31 40.64,67.31 | 45.72,67.31 D9.A | 40.64,67.31 45.72,67.31 | 55.88,67.31 DB.A | 45.72,67.31 52.07,67.31 | 52.07,67.31 55.88,67.31 | 55.88,67.31 60.96,67.31 DC.A 63.5,67.31 68.58,67.31 DD.K | 52.07,67.31 DA.A | DF.A 76.2,69.85 73.66,69.85 DE.A | H13.1 54.61,3.81 68.58,3.81 0D.K
S14
  Top 0.406: H49.1 H14.1 | 0E.K 73.66,2.54 73.66,3.81 73.03,4.45 73.03,6.35 74.3,7.62 | 74.3,7.62 74.93,8.26 2E.K 3E.K 4E.K 5E.K 6E.K 7E.K 73.66,38.1 73.66,39.37 73.03,40.01 73.03,41.91 74.93,43.81 | 74.3,7.62 1E.K | 74.93,43.81 9E.K AE.K BE.K CE.K DE.K 74.93,71.12 | 74.93,71.12 74.93,73.03 | FE.K 73.66,78.74 73.66,77.47 73.03,76.83 73.03,74.93 74.93,73.03 | 74.93,73.03 EE.K | 74.93,71.12 EF.A | EB.A 55.88,72.39 H32.1 | 74.93,43.81 8E.K
  Bottom 0.406: H14.1 57.15,6.35 73.03,6.35 74.3,7.62 1E.K | 50.8,74.93 48.26,74.93 E9.A 45.72,74.93 43.81,74.93 42.55,73.66 E8.A 40.64,72.39 38.1,72.39 E7.A 35.56,74.93 30.48,74.93 | EA.A 50.8,74.93 | 60.96,74.93 EC.A | 50.8,74.93 57.15,74.93 | 57.15,74.93 60.96,74.93 | 60.96,74.93 66.04,74.93 ED.A 68.58,72.39 73.66,72.39 EE.K | 57.15,74.93 EB.A | E0.A 2.54,72.39 5.08,72.39 | E1.A 5.08,72.39 | 5.08,72.39 10.16,72.39 E2.A 12.7,74.93 15.24,74.93 | 15.24,74.93 E3.A | 20.32,74.93 E4.A | 15.24,74.93 20.32,74.93 | 25.4,74.93 E5.A | 20.32,74.93 25.4,74.93 | 30.48,74.93 E6.A | 25.4,74.93 30.48,74.93
S15
  Top 0.406: H33.1 58.42,77.47 FB.A | H50.1 H15.1 | 0F.K 1F.K 2F.K 3F.K 4F.K 5F.K 6F.K 7F.K 8F.K 9F.K AF.K BF.K CF.K DF.K EF.K FF.K 80.01,80.01 73.66,80.01 FE.A
  Bottom 0.406: F0.A 2.54,80.01 5.08,80.01 | F1.A 5.08,80.01 | 10.16,80.01 F2.A | 5.08,80.01 10.16,80.01 | 15.24,80.01 F3.A | 10.16,80.01 15.24,80.01 | 20.32,80.01 F4.A | 15.24,80.01 20.32,80.01 | 25.4,80.01 F5.A | 20.32,80.01 25.4,80.01 | 30.48,80.01 F6.A | 25.4,80.01 30.48,80.01 | 35.56,80.01 F7.A | 30.48,80.01 35.56,80.01 | 40.64,80.01 F8.A | 35.56,80.01 40.64,80.01 | 45.72,80.01 F9.A | 40.64,80.01 45.72,80.01 | 50.8,80.01 FA.A | 45.72,80.01 50.8,80.01 | 55.88,80.01 FB.A | 50.8,80.01 55.88,80.01 | 60.96,80.01 FC.A | 55.88,80.01 60.96,80.01 | 66.04,80.01 FD.A | 60.96,80.01 66.04,80.01 | FE.A 71.12,80.01 66.04,80.01 | H50.1 59.69,16.51 78.74,16.51 3F.K

## Text on the board
tPlace: M | I | C | H | A | E | L | R | U | L | E | T | R | E | E | H | O | U | S | E | A | S | 2 | 2 | O | L | A | B | S | J | U | L | Y | 2 | 0 | 1 | 2